# Altium PCB boostPCB.PcbDoc
Units mm, origin at the board's own origin, x right, y up, seen from the top; angles counter-clockwise.
Board outline 49.91 x 28.07 mm, 2 copper layers (Top Layer, Bottom Layer); 15 components, 5 nets, 30 pads, 29 vias.
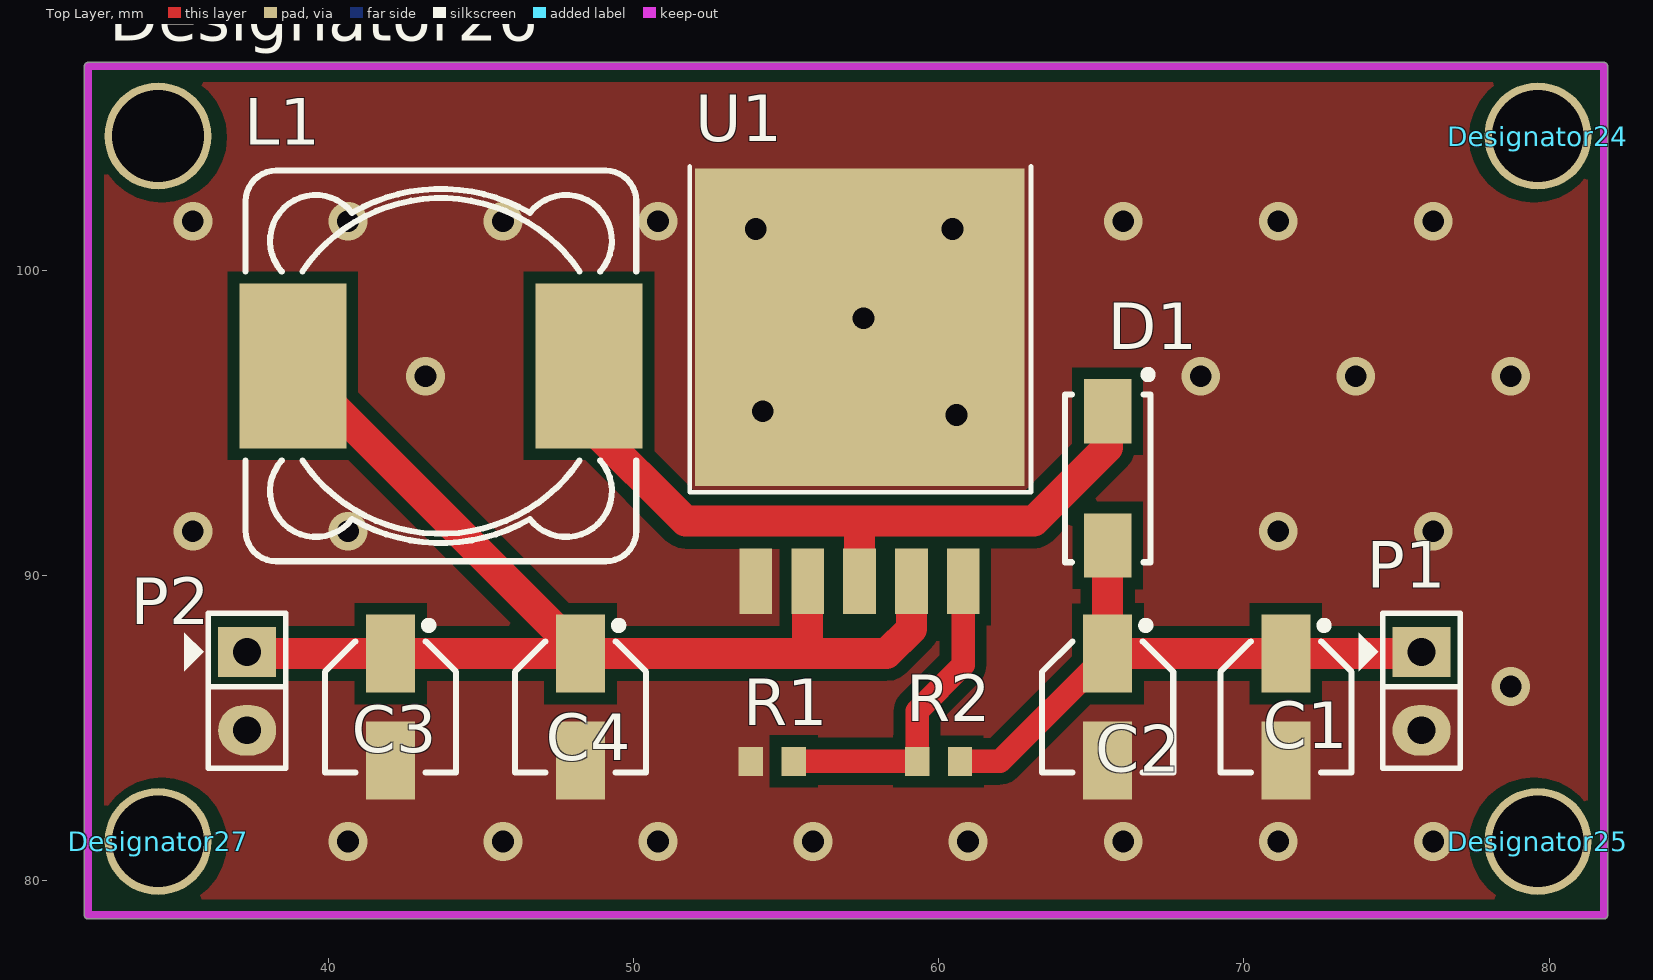
[diagram p0: Top Layer view]
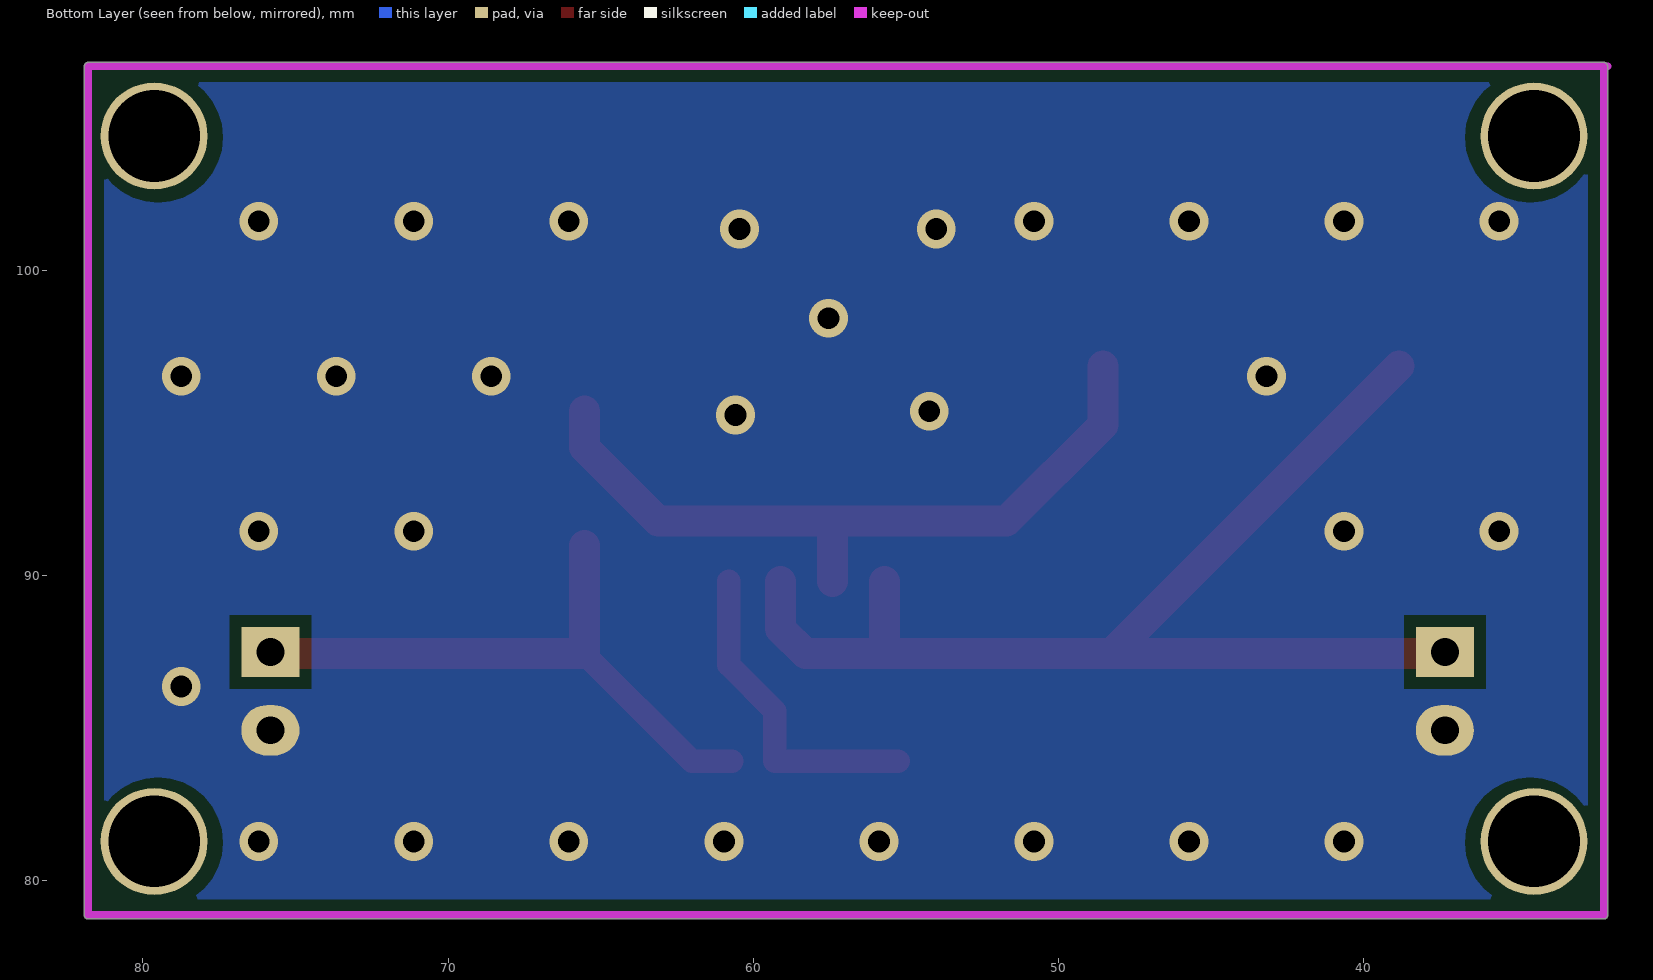
[diagram p1: Bottom Layer view, seen from below]
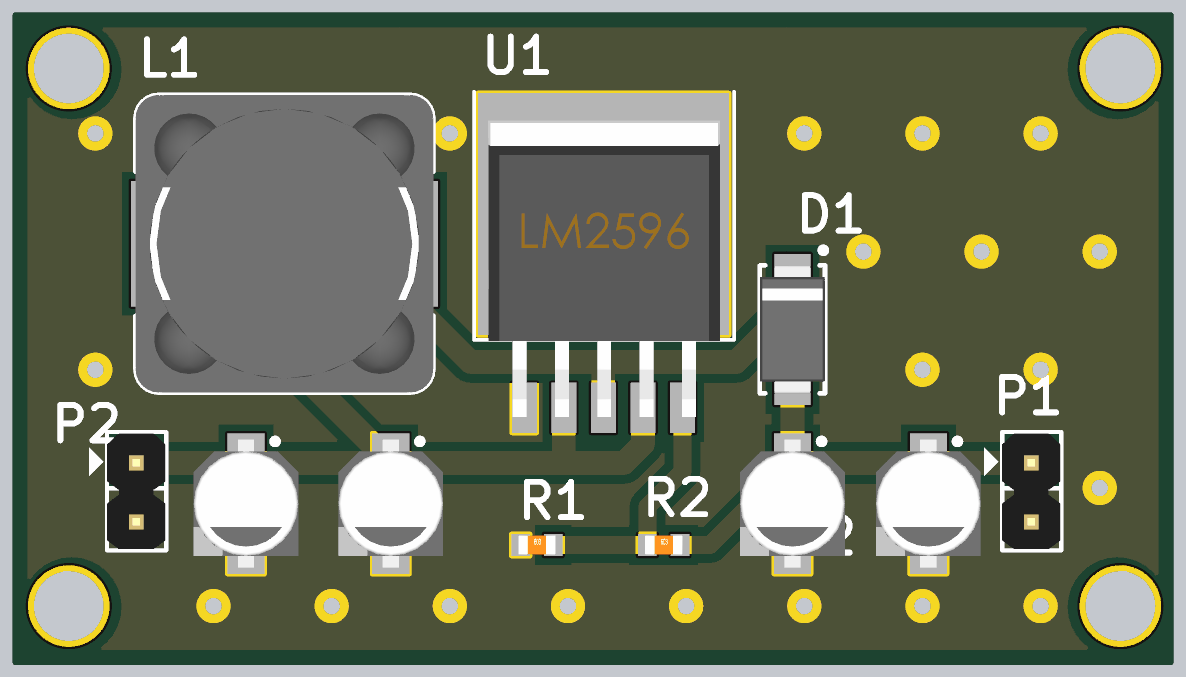
[diagram p2: 3D render of the assembled board from above, using the file's embedded part models]

## Layer stack, top to bottom
Top Solder: solder mask 0.0102, Solder Resist, Dk 3.5
Top Layer: signal copper 0.0356
Dielectric 1: dielectric 0.32, FR-4, Dk 4.8
Bottom Layer: signal copper 0.0356
Bottom Solder: solder mask 0.0102, Solder Resist, Dk 3.5

## Board outline
32.131,78.74 cw(c32.131,78.867) 32.004,78.867 32.004,106.68 cw(c32.131,106.68) 32.131,106.807 81.788,106.807 cw(c81.788,106.68) 81.915,106.68 81.915,78.867 cw(c81.788,78.867) 81.788,78.74
cut-out: 92.075,96.139

## Design rules (kind name [scope] priority, off if disabled: settings)
Clearance [All] p1: gap=0.381 ignorepadtopadclearanceinfootprint=FALSE
PolygonConnect [All] p1: connectstyle=Direct reliefconductorwidth=0.254 reliefentries=4 polygonreliefangle="90 Angle" airgapwidth=0.254
RoutingVias [All] p1: holewidth=0.711 width=1.27 viastyle="Through Hole" minholewidth=0.711 minwidth=1.27 maxholewidth=0.711 maxwidth=1.27
SolderMaskExpansion [All] p1: expansion=0.102
Width [All] p1: maxlimit=1.016 minlimit=0.254 preferedwidth=0.762
30 further rules are at their usual default settings.

## Classes and differential pairs
component class boost: C1 C2 C3 C4 D1 L1 P1 P2 R1 R2 U1

## Components (designator, comment, footprint, x,y, rotation, side; value= is the part's Value field where it differs from the comment)
C1 "Cap Pol SMD" "CAP ALU SIZE B" 71.374,85.684 r270 top value=220uF/50V
C2 "Cap Pol SMD" "CAP ALU SIZE B" 65.532,85.684 r270 top value=105
C3 "Cap Pol SMD" "CAP ALU SIZE B" 42.037,85.684 r270 top value=47uF/50V
C4 "Cap Pol SMD" "CAP ALU SIZE B" 48.26,85.684 r270 top value=105
D1 "D Schottky" SS34 65.532,93.177 r270 top
Designator24 "Comment" "LO KHOAN 3MM" 79.629,104.394 r180 top
Designator25 "Comment" "LO KHOAN 3MM" 79.629,81.28 r180 top
Designator26 "Comment" "LO KHOAN 3MM" 34.417,104.394 r180 top
Designator27 "Comment" "LO KHOAN 3MM" 34.417,81.28 r180 top
L1 "Inductor" "INDUCTOR 12.5x12.5" 43.688,96.86 r0 top value=33uH/4A
P1 "Header 2" JP2 75.819,87.487 r270 top
P2 "Header 2" JP2 37.338,87.487 r270 top
R1 "RESISTOR SMD" RES-SM-0603 53.859,83.906 r0 top value=1K
R2 "RESISTOR SMD" RES-SM-0603 59.309,83.906 r0 top value=13.8K
U1 "XL6009" LM2596 54.004,89.805 r0 top

## Footprints (in the part's own frame and the unit in brackets; to place one, negate y for a bottom-side part, rotate by r counter-clockwise, add the part's x,y. Pads: shape width x height; smd on the part's side, far side on the other; paste and mask are expansions set on the pad)
"CAP ALU SIZE B" [mm] "Capacitor, Aluminium Electrolytric, 4.3mm L X 4.3mm W X 5.4mm H, IPC Medium Density"
  rect 2.55x1.6 smd: 1(-1.75,0) 2(1.75,0)
  silkscreen extent -2.8,-2.15 2.15,2.15, body extent -2.75,-2.25 2.75,2.25, height 5.7
"INDUCTOR 12.5x12.5" [mm] "SMD Inductor  Body Width 12.5mm Body Lenght 12.5mm Height 8mm"
  rect 3.5x5.4 smd: 1(-4.85,0) 2(4.85,0)
  silkscreen extent -6.4,-6.4 6.4,6.4, body extent -6.4,-6.4 6.4,6.4, height 8
JP2 [mil]
  rect 65x75 hole 36: 1(0,0)
  oval 65x75 hole 36: 2(101,0)
  silkscreen extent -50,-81 150,50, body extent -48,-50 148,48, height 323
LM2596 [mm]
  rect 1.07x2.16 smd: 1(0,0) 2(1.7,0) 3(3.4,0) 4(5.1,0) 5(6.8,0)
  rect 10.8x10.41 smd: 6(3.4,8.325)
  silkscreen extent -2.16,2.92 9.02,13.59, body extent -1.57,-0.39 8.43,12.36, height 4.3
"LO KHOAN 3MM" [mil]
  round 138 hole 118.1: 1(0,0)
RES-SM-0603 [mm]
  rect 0.8x0.95 smd: 1(-0.014,0) 2(1.386,0)
  body extent -0.11,-0.4 1.49,0.4, height 0.3
SS34 [mm] "DO-214-AC/SMA Molded Diode, Body 5.3x2.6mm, IPC Medium Density"
  rect 2.1x1.55 smd: 1(-2.2,0) 2(2.2,0)
  silkscreen extent -3.52,-1.4 2.75,1.45, body extent -2.75,-1.4 2.75,1.4, height 2.3

## Part data
C1 C2 C3 C4: "Polarized Capacitor (Radial)"
D1: "Schottky Diode", Code_JEDEC=DO-214-AA, LatestRevisionDate=17-Jul-2002, LatestRevisionNote="Re-released for DXP Platform.", PackageDescription="DO-214-AA/SMB; 2 C-Bend Leads; Body 5.3 x 3.6 mm, inc. leads (LxW)", PackageReference=SMB, Published=8-Jun-2000, Publisher="Altium Limited"
P1 P2: "Header, 2-Pin", LatestRevisionDate=17-Jul-2002, LatestRevisionNote="Re-released for DXP Platform.", Publisher="Altium Limited"
R1 R2: "Resistor"
U1: "SMD"

## Via types
v1: diameter 1.27, hole 0.711, Top Layer to Bottom Layer, 29 vias

## Nets (pads, with @x,y where several pads share a name; then routed paths per layer and width w, separated by ;. In a path a pad name is that pad's centre, name@x,y a point inside that pad or via, vN(x,y) a via of type N, cw(c..) or ccw(c..) an arc to the next point about the centre after c; other vN are vias at no path point)
GND: C1.2 C2.2 C3.2 C4.2 P1.2 P2.2 R1.1 U1.1 U1.6
  other v1: 40.64,81.28 45.72,81.28 50.8,81.28 55.88,81.28 60.96,81.28 66.04,81.28 71.12,81.28 76.2,81.28 78.74,86.36 35.56,91.44 40.64,91.44 71.12,91.44 76.2,91.44 60.579,95.25 54.229,95.377 43.18,96.52 68.58,96.52 73.66,96.52 78.74,96.52 57.531,98.425 54.004,101.346 60.452,101.346 35.56,101.6 40.64,101.6 45.72,101.6 50.8,101.6 66.04,101.6 71.12,101.6 76.2,101.6
NetC1_1: C1.1 C2.1 D1.2 P1.1 R2.2 | length 20.2
  Top Layer w0.762: R2.2 62.004,83.906 C2.1
  Top Layer w1.016: D1.2 C2.1 C1.1 75.766,87.434 P1.1
NetC3_1: C3.1 C4.1 L1.1 P2.1 U1.2 U1.4 | length 39.4
  Top Layer w1.016: P2.1 37.391,87.434 C3.1 C4.1 ; L1.1 48.26,87.438 C4.1 ; U1.2 55.704,87.54 55.598,87.434 ; U1.4 59.104,88.245 58.293,87.434 55.598,87.434 ; C4.1 55.598,87.434
NetD1_1: D1.1 L1.2 U1.3 | length 24.4
  Top Layer w1.016: L1.2 48.538,94.931 51.695,91.774 57.531,91.774 ; U1.3 57.404,91.647 57.531,91.774 ; D1.1 65.532,94.193 63.113,91.774 57.531,91.774
NetR1_2: R1.2 R2.1 U1.5 | length 10.6
  Top Layer w0.762: R1.2 R2.1 59.295,85.554 60.804,87.063 U1.5
pads on no net: Designator24.1 Designator25.1 Designator26.1 Designator27.1

## Polygon pours and split planes (outlines as drawn)
GND on Top Layer "Top Layer-No Net1" (solid, pour order 52): 32.131,78.74 cw(c32.131,78.867) 32.004,78.867 32.004,106.68 cw(c32.131,106.68) 32.131,106.807 81.788,106.807 cw(c81.788,106.68) 81.915,106.68 81.915,78.867 cw(c81.788,78.867) 81.788,78.74
GND on Bottom Layer "Top Layer-No Net" (solid, pour order 65): 32.131,78.74 cw(c32.131,78.867) 32.004,78.867 32.004,106.68 cw(c32.131,106.68) 32.131,106.807 81.788,106.807 cw(c81.788,106.68) 81.915,106.68 81.915,78.867 cw(c81.788,78.867) 81.788,78.74

## Keep-outs
Top Layer:
  lines w0.254: 32.512,106.68 81.788,106.68 81.788,78.867 32.131,78.867 32.131,106.68 35.306,106.68
Bottom Layer:
  lines w0.254: 32.004,106.68 81.661,106.68 81.788,106.68 81.788,78.867 32.131,78.867 32.131,106.68